# Altium PCB PCB1(zadanie_7).PcbDoc
Units mm, origin at the board's own origin, x right, y up, seen from the top; angles counter-clockwise.
Board outline 117.75 x 63.38 mm, 2 copper layers (Top Layer, Bottom Layer), stack 1.535 mm thick; 49 components, 73 nets, 316 pads, 80 vias.
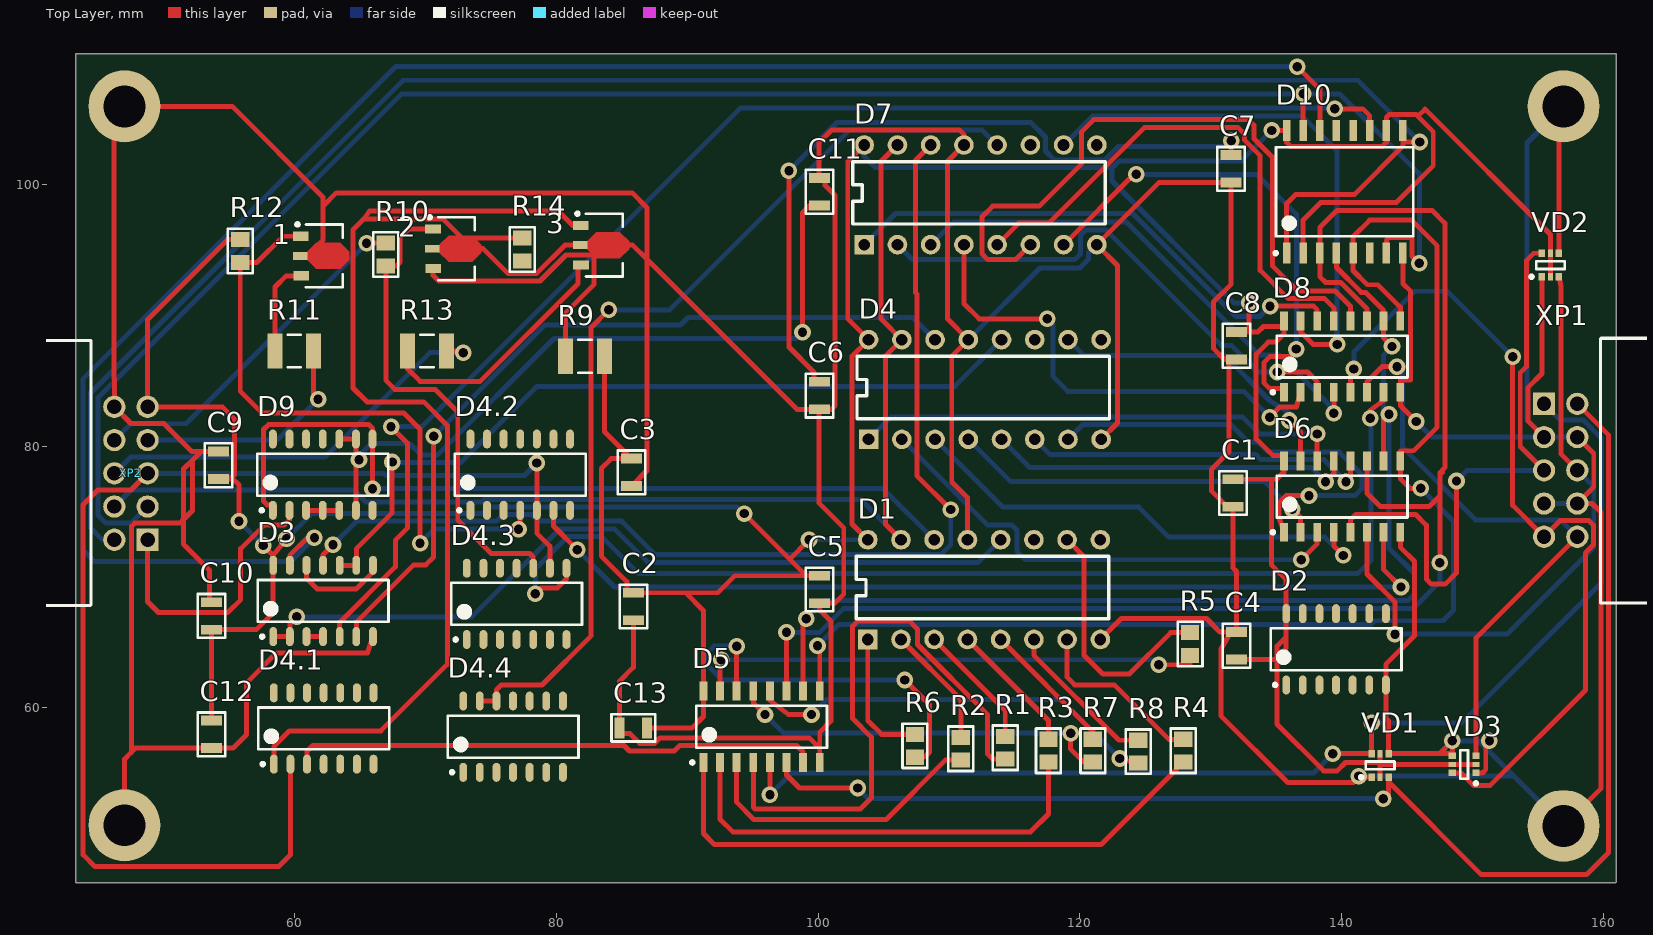
[diagram p0: Top Layer view]
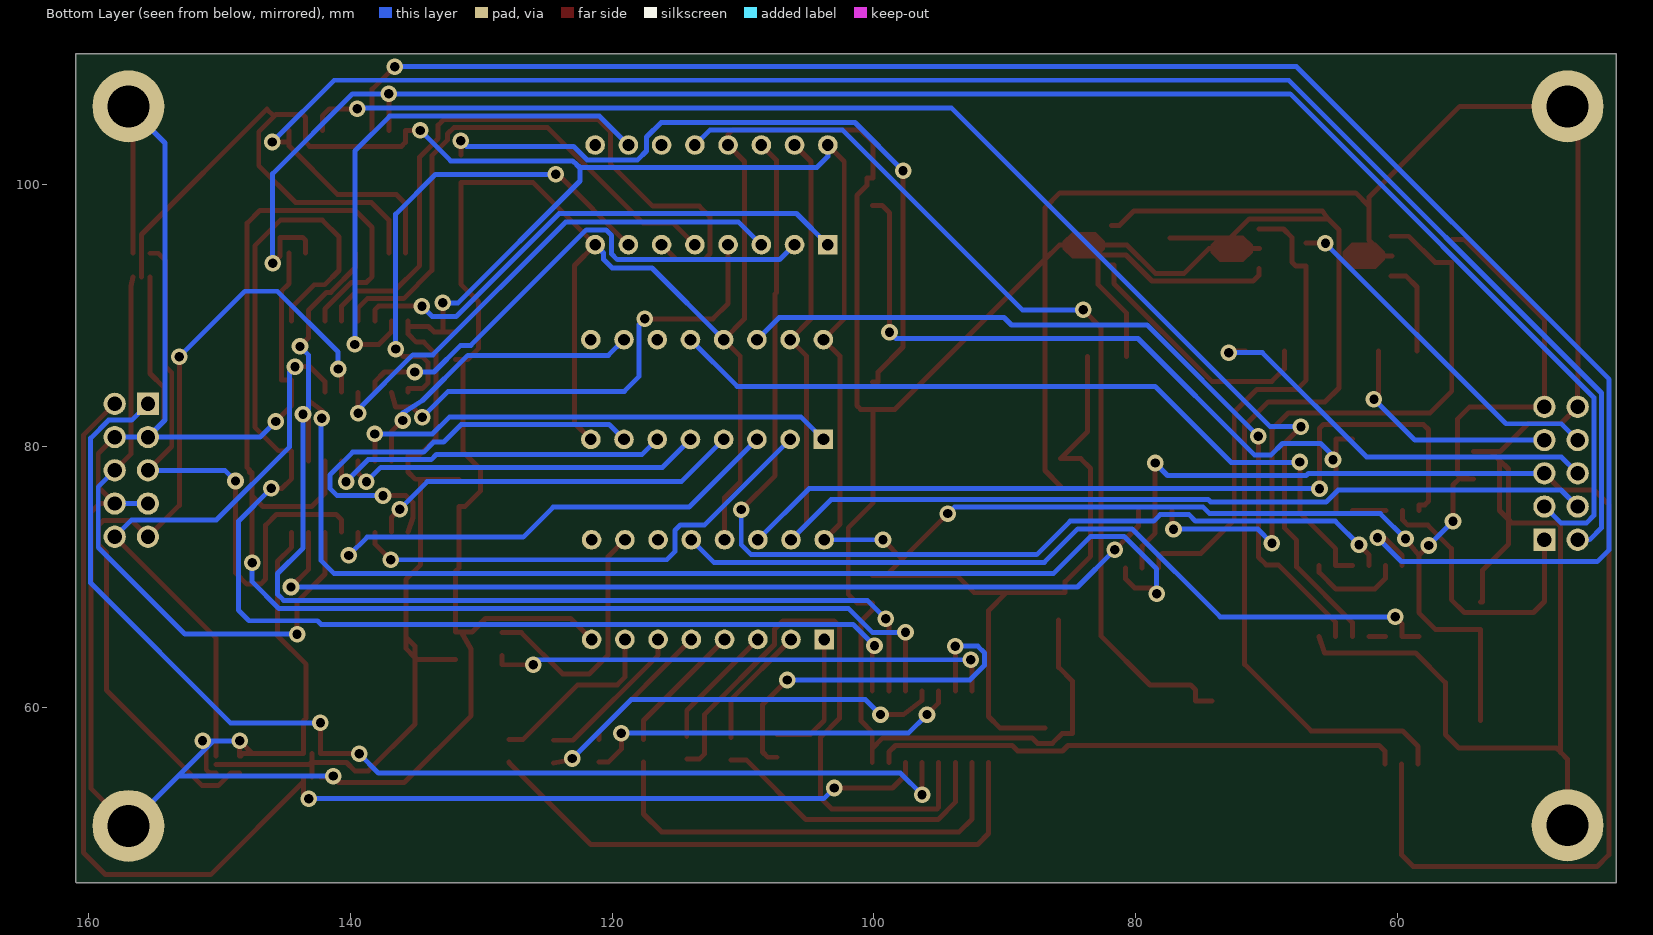
[diagram p1: Bottom Layer view, seen from below]
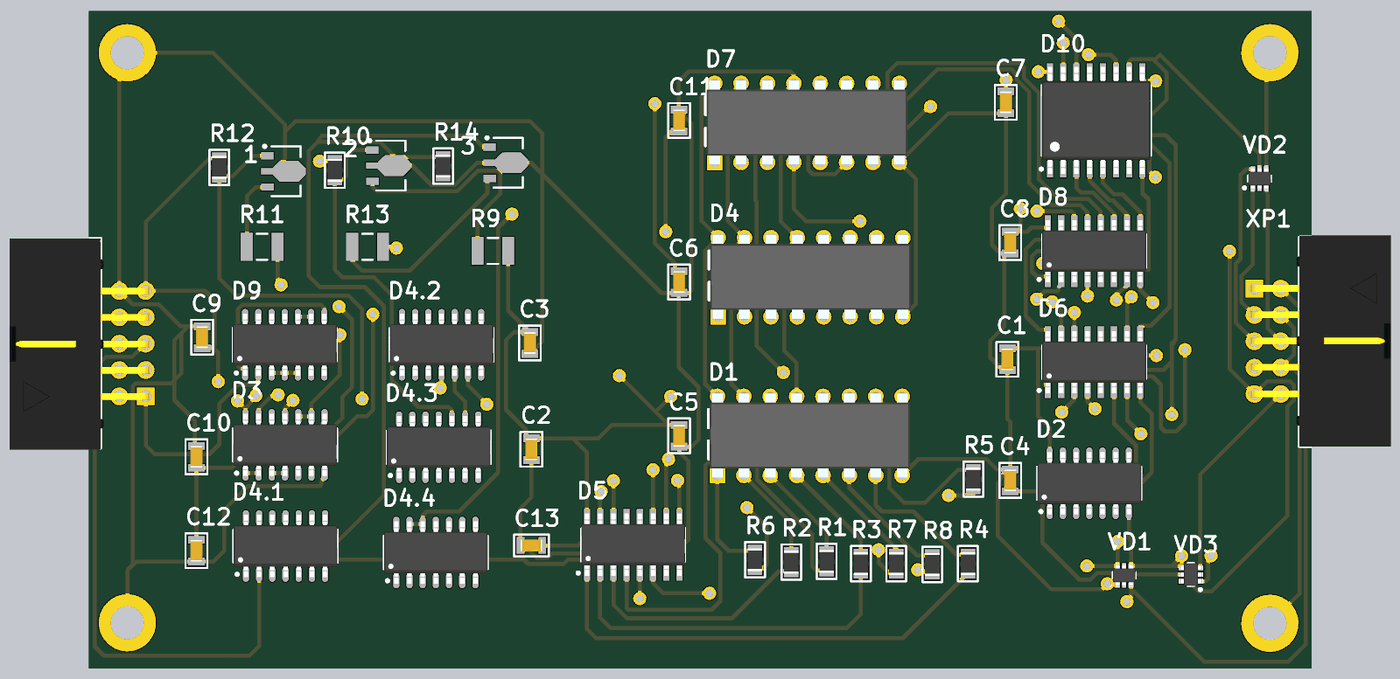
[diagram p2: 3D render of the assembled board from above, using the file's embedded part models]

## Layer stack, top to bottom
Top Solder: solder mask 0.0254, SM-001, Dk 4
Top Layer: signal copper 0.018
Dielectric 1: core 1.499, Core-043, Dk 4.3
Bottom Layer: signal copper 0.018
Bottom Solder: solder mask 0.0254, SM-001, Dk 4

## Board outline
43.25,46.625 160.925,46.625 160.975,46.675 161.004,46.654 161.004,47.972 161,48 161,110 43.25,110

## Design rules (kind name [scope] priority, off if disabled: settings)
Clearance [All] p1: gap=0.2 ignorepadtopadclearanceinfootprint=FALSE
DiffPairsRouting [All] p1: maxlimit=0.77 minlimit=0.2 mostfreqgap=0.35 toplayer_minwidth=0.2 toplayer_maxwidth=0.5 toplayer_prefwidth=0.38 bottomlayer_minwidth=0.2 bottomlayer_maxwidth=0.5 bottomlayer_prefwidth=0.38 maxuncoupledlength=12.7
HoleSize [All] p1: absolutevalues=TRUE maxlimit=4.5 minlimit=0.3 maxpercent=80.000 minpercent=20.000
PolygonConnect [All] p1: connectstyle=Relief reliefconductorwidth=0.254 reliefentries=4 polygonreliefangle="90 Angle" airgapwidth=0.254
RoutingVias [All] p1: holewidth=0.711 width=1.27 viastyle="Through Hole" minholewidth=0.711 minwidth=1.27 maxholewidth=0.711 maxwidth=1.27
SolderMaskExpansion [All] p1: expansion=0.102 istentingtop=FALSE
Width [All] p1: maxlimit=0.5 minlimit=0.2 preferedwidth=0.38 minimp=50.000000 maximp=50.000000 favimp=50.000000
28 further rules are at their usual default settings.

## Classes and differential pairs
component class МИЭТ_8161930_003_Э3_Лист_2: 1 2 3 C11 C12 C13 D9 D10 R9 R10 R11 R12 R13 R14 XP2 Р3
component class МИЭТ_8161930_003_Э3_Лист_1: C1 C2 C3 C4 C5 C6 C7 C8 C9 C10 D1 D2 D3 D4 D4.1 D4.2 D4.3 D4.4 D5 D6 D7 D8 R1 R2 R3 R4 R5 R6 R7 R8 VD1 VD2 VD3 XP1
differential pair L3: +L3_P -L3_N
differential pair L2: +L2_P -L2_N
differential pair L1: +L1_P -L1_N

## Components (designator, comment, footprint, x,y, rotation, side; value= is the part's Value field where it differs from the comment)
1 "Транзистор" SOT89-150P340X160-3N 62,94.55 r0 top
2 "Транзистор" SOT89-150P340X160-3N 72.1,95.1 r0 top
3 "Транзистор" SOT89-150P340X160-3N 83.4,95.375 r0 top
C1 "" 0805_N 131.7,76.425 r90 top
C2 "" 0805_N 85.875,67.75 r90 top
C3 "" 0805_N 85.725,78 r90 top
C4 "" 0805_N 131.975,64.75 r90 top
C5 "" 0805_N 100.1,69.05 r90 top
C6 "" 0805_N 100.1,83.875 r90 top
C7 "" 0805_N 131.55,101.2 r270 top
C8 "" 0805_N 131.975,87.675 r90 top
C9 "" 0805_N 54.175,78.55 r90 top
C10 "" 0805_N 53.625,67.025 r90 top
C11 "" 0805_N 100.1,99.45 r270 top
C12 "" 0805_N 53.625,57.975 r90 top
C13 "" 0805_N 85.875,58.475 r180 top
D1 "DIP-16" DIP16 103.79,65.23 r90 top
D2 "74AC00SC" SO14-N 139.585,64.475 r90 top
D3 "74AC00SC" SO14-N 62.155,68.175 r90 top
D4 "DIP-16" DIP16 103.855,80.525 r90 top
D4.1 "74AC00SC" SO14-N 62.2,58.425 r90 top
D4.2 "74AC00SC" SO14-N 77.225,77.825 r90 top
D4.3 "74AC00SC" SO14-N 76.95,67.95 r90 top
D4.4 "74AC00SC" SO14-N 76.675,57.8 r90 top
D5 "SOIC-16" SO16-N 95.675,58.55 r90 top
D6 "SOIC-16" SO16-N 140.05,76.15 r90 top
D7 "DIP-16" DIP16 103.52,95.405 r90 top
D8 "SOIC-16" SO16-N 140.05,86.85 r90 top
D9 "74AC00SC" SO14-N 62.125,77.825 r90 top
D10 "MC14520BDWG" SOIC-16W-N 140.25,99.45 r90 top
R1 "0805" RES_0805_2012_N 114.3,56.95 r270 top
R2 "0805" RES_0805_2012_N 110.9,56.875 r270 top
R3 "0805" RES_0805_2012_N 117.6,56.725 r270 top
R4 "0805" RES_0805_2012_N 127.9,56.725 r270 top
R5 "0805" RES_0805_2012_N 128.425,64.875 r270 top
R6 "0805" RES_0805_2012_N 107.4,57.1 r270 top
R7 "0805" RES_0805_2012_N 121,56.725 r270 top
R8 "0805" RES_0805_2012_N 124.475,56.65 r270 top
R9 "Резистор" CAPC3225X06N 82.175,86.875 r0 top
R10 "0805" RES_0805_2012_N 66.95,94.65 r90 top
R11 "Резистор" CAPC3225X06N 59.95,87.275 r0 top
R12 "0805" RES_0805_2012_N 55.825,94.925 r90 top
R13 "Резистор" CAPC3225X06N 70.1,87.275 r0 top
R14 "0805" RES_0805_2012_N 77.375,95.05 r90 top
VD1 "SOT-363" SOT363_NXP 142.95,55.6 r90 top
VD2 "SOT-363" SOT363_NXP 155.975,93.85 r90 top
VD3 "SOT-363" SOT363_NXP 149.375,55.675 r180 top
XP1 "TE_1-1634689-0" BH-10R 156.755,78.16 r180 top
XP2 "TE_1-1634689-0" BH-10R 47.47,77.93 r0 top

## Footprints (in the part's own frame and the unit in brackets; to place one, negate y for a bottom-side part, rotate by r counter-clockwise, add the part's x,y. Pads: shape width x height; smd on the part's side, far side on the other; paste and mask are expansions set on the pad)
0805_N [mm] "Резистор, конденсатор"
  rect 0.75x1.6 smd: 1(-1.05,0) 2(1.05,0)
  silkscreen extent -1.67,-1.05 1.68,1.05, body extent -1.05,-0.58 1.05,0.58, height 1
BH-10R [mm] "Разъем угловой 2х5х2,54 типа ВН"
  rect 1.7x1.7 hole 1.1: 1(1.27,-5.08)
  round 1.7 hole 1.1: 2(-1.27,-5.08) 3(1.27,-2.54) 4(-1.27,-2.54) 5(1.27,0) 6(-1.27,0) 7(1.27,2.54) 8(-1.27,2.54) 9(1.27,5.08) 10(-1.27,5.08)
  silkscreen extent -11.8,-10.1 -3.05,10.15, body extent -11.85,-10.2 1.65,10.15, height 9.13
CAPC3225X06N [mm] "Chip Capacitor, 2-Leads, Body 3,20x2,50mm, IPC Medium Density"
  rect 1.15x2.7 smd: 1(-1.475,0) 2(1.475,0)
  silkscreen extent -0.5,-1.25 0.5,1.25, body extent -1.7,-1.35 1.7,1.35, height 0.6
DIP16 [mm]
  rect 1.5x1.5 hole 0.9: 1(0,0)
  round 1.5 hole 0.9: 2(0,-2.54) 3(0,-5.08) 4(0,-7.62) 5(0,-10.16) 6(0,-12.7) 7(0,-15.24) 8(0,-17.78) 9(7.62,-17.78) 10(7.62,-15.24) 11(7.62,-12.7) 12(7.62,-10.16) 13(7.62,-7.62) 14(7.62,-5.08) 15(7.62,-2.54) 16(7.62,0)
  silkscreen extent 1.58,-18.41 6.35,0.89, body extent -0.25,-18.54 7.95,0.76, height 5.08
RES_0805_2012_N [mm] "Rezistor 0805"
  rect 1.15x1.4 smd: 1(-0.875,0) 2(0.875,0)
  silkscreen extent -1.7,-0.95 1.7,0.95, body extent -1.1,-0.7 1.1,0.7, height 0.6
SO14-N [mm]
  oval 1.45x0.6 smd: 1(-2.725,3.81) 2(-2.725,2.54) 3(-2.725,1.27) 4(-2.725,0) 5(-2.725,-1.27) 6(-2.725,-2.54) 7(-2.725,-3.81) 8(2.725,-3.81) 9(2.725,-2.54) 10(2.725,-1.27) 11(2.725,0) 12(2.725,1.27) 13(2.725,2.54) 14(2.725,3.81)
  silkscreen extent -2.85,-5 1.6,5, body extent -3,-5 3,5, height 1.45
SO16-N [mm] "SOIC, 16-Leads, Body 9,90x3,90mm, Pitch 1,27mm, IPC Medium Density"
  rect 1.45x0.6 smd: 1(-2.725,4.445) 2(-2.725,3.175) 3(-2.725,1.905) 4(-2.725,0.635) 5(-2.725,-0.635) 6(-2.725,-1.905) 7(-2.725,-3.175) 8(-2.725,-4.445) 9(2.725,-4.445) 10(2.725,-3.175) 11(2.725,-1.905) 12(2.725,-0.635) 13(2.725,0.635) 14(2.725,1.905) 15(2.725,3.175) 16(2.725,4.445)
  silkscreen extent -2.85,-5 1.6,5.42, body extent -3,-5 3,5, height 1.45
SOIC-16W-N [mm] "SOIC, 16-Leads, Body 10,30x7,50mm, Pitch 1,27mm, IPC Medium Density"
  rect 1.62x0.58 smd: 1(-4.69,4.445) 2(-4.69,3.175) 3(-4.69,1.905) 4(-4.69,0.635) 5(-4.69,-0.635) 6(-4.69,-1.905) 7(-4.69,-3.175) 8(-4.69,-4.445) 9(4.69,-4.445) 10(4.69,-3.175) 11(4.69,-1.905) 12(4.69,-0.635) 13(4.69,0.635) 14(4.69,1.905) 15(4.69,3.175) 16(4.69,4.445)
  silkscreen extent -4.81,-5.25 3.4,5.41, body extent -5.15,-5.25 5.15,5.25, height 2.65
SOT89-150P340X160-3N [mm] "SOT89, 3-Leads, Body 4,60x2,60mm, Pitch 1,50mm, Lead Span 3,4mm, IPC Medium Density"
  rect 1.2x0.7 smd: 1(-1.55,1.5) 2(-1.524,-1.524)
  rect 1.1x0.6 smd: 3(-1.6,0)
  Top Layer region: -1.05,0.3 -0.35,1 1.45,1 2.15,0.3 2.15,-0.3 1.45,-1 -0.35,-1 -1.05,-0.3
  silkscreen extent -1.92,-2.4 1.65,2.52, body extent -1.15,-2.4 1.65,2.4, height 1.6
SOT363_NXP [mm]
  rect 0.55x0.5 smd: 1(-0.9,0.65) 3(-0.9,-0.65) 4(0.9,-0.65) 6(0.9,0.65)
  rect 0.55x0.4 smd: 2(-0.9,0) 5(0.9,0)
  silkscreen extent -1.02,-1.1 0.3,1.57, body extent -1.15,-1.1 1.15,1.1, height 1.1

## Part data
1 2 3: "Транзистор 2Т665А9 АЕЯР.432140.605 ТУ"
C1 C2 C3 C4 C5 C6 C7 C8 C9 C10 C11 C12 C13: library part К10-79_0805_Н90, "Чип конденсатор 0805 Н90 ряд Е6", Case=0805, Manufacturer="ООО \"Кулон\"", Tolerance=+80%-20%, BOM="Конденсатор К10-79-*-B-*+80%-20%-Н90 АЖЯР.673511.004 ТУ", Created_by=Желобаев, Issue_date=19_12_2018, Name="Конденсатор К10-79", TKE=Н90, TU="АЖЯР.673511.004 ТУ", Type=K10-79, Version=0, Weight=0.05
D1 D4 D7: library part HCF4017BEY, "Декадный счетчик c 10 декодированными выходами", Manufacturer=STMicroelectronics, Power_Voltage="-0.5 -22 V", BOM="Микросхема HCF4017BEY \"STMicroelectronics\"", Case=DIP-16, Created_by=Желобаев, Issue_date=05.04.2019, Name="Микросхема HCF4017BEY", Version=0
D2 D3 D4.1 D4.2 D4.3 D4.4 D9: "4 элемента 2И-НЕ TTL SOIC-14", Case=SOIC-14, Manufacturer="ON Semiconductor", Power_Voltage="4.5 - 5.5 V", BOM="Микросхема 74AC00SC \"ON Semiconductor\"", Created_by=Желобаев, Issue_date=10.04.2019, Name="Микросхема 74AC00SC", Version=0
D5 D6 D8: library part 74HC151D, "мультиплексор 8 канальный CMOS", Manufacturer="NXP Semiconductors", Power_Voltage="2.0 -6.0 V", BOM="Микросхема 74YC151D \"NXP Semiconductors\"", Case=SOIC-16, Created_by=Желобаев, Issue_date=05.04.2019, Name="Микросхема 74YC151D", Version=0
D10: "Два двоичных счетчика", Case=SOIC-16, Manufacturer=Motorola, BOM="Микросхема MC14520BDWG \"Motorola\"", Created_by=Желобаев, Issue_date=6.01.2019, Name="Микросхема MC14520BDWG", Version=0
R1 R2 R3 R4 R5 R6 R7 R8 R10 R12 R14: library part Р1-12-0,125-5%, "Резистор от 0,75 Ом до 2 МОм", Manufacturer="ОАО \"НПО \"Эркон\"", Tolerance=5%, Voltage=150, BOM="Резистор Р1-12-0,125 * 5%-M-\"A\" АЛЯР.434110.005 ТУ", ComponentLink1Description="Сайт производителя", ComponentLink1URL=https://www.erkon-nn.ru/catalog/rezistory-obshchego-primeneniya/, Created_by=Желобаев, Hight=0,5, Issue_date=05_12_2018, LiveStatus=Производится, Name="Резистор Р1-12-0,125", Reliability=0,000001, Size=0805, TKR=M, TU="АЛЯР.434110.005 ТУ", Type="Р1-12-0,125±5%-М-\"А\"", Version=00, Weight=0,01
R9 R11 R13: "Резистор Р1-12-0,1 4,7 кОм 5%-M-\"A\" АЛЯР.434110.005 ТУ"
VD1 VD2 VD3: library part BAV99S, "Высокоскоростные, переключающие диоды", Manufacturer=Nexperia, Voltage=100, BOM="Диод BAV99S \"Nexperia\"", Case=SOT-363, Created_by=Желобаев, Issue_date=07.01.2019, Name="Диод BAV99S", Version=0
XP1 XP2: "Вилка типа BH-10R угловая правая двухрядная 2х5х2.54", Case=BH-10R, Manufacturer="TE Connectivity", BOM="Вилка угловая TE_1-1634689-0 \"TE Connectivity\"", Created_by=Желобаев, Issue_date=13.05.2019, Name="Вилка угловая TE_1-1634689-0", Version=0

## Free pads (board coordinates)
  round 5.5 hole 3.2: 1(-315.3,94.275) M1(46.975,51.025) M2(46.975,105.975) M3(156.975,105.975) M4(156.975,50.975)

## Via types
v1: diameter 1.27, hole 0.711, Top Layer to Bottom Layer, 80 vias

## Nets (pads, with @x,y where several pads share a name; then routed paths per layer and width w, separated by ;. In a path a pad name is that pad's centre, name@x,y a point inside that pad or via, vN(x,y) a via of type N, cw(c..) or ccw(c..) an arc to the next point about the centre after c; other vN are vias at no path point)
+5: C1.2 C2.2 C3.2 C4.1 C5.2 C8.2 C9.1 C10.1 C12.2 C13.1 D1.16 D2.14 D3.14 D4.16 D5.16 D6.16 D7.16 D8.16 D10.2 D10.10 D10.16 R9.2 R12.2 VD1.2 VD1.5 VD2.2 VD2.5 VD3.2 VD3.5 XP2.9 | length 356.6
  Top Layer w0.38: C12.2 C10.1 57.048,65.975 58.345,67.272 D3.14 58.345,71.652 ; v1(55.728,74.27) 55.728,77.043 55.169,77.602 ; R12.2 54.864,95.8 48.74,89.676 XP2.9 54.458,83.01 55.372,82.096 55.372,77.805 55.169,77.602 ; v1(57.582,72.415) 58.345,71.652 ; v1(59.36,72.923) 58.345,71.652 ; R9.2 83.65,81.125 C3.2 84.181,79.05 83.423,78.292 83.423,71.589 85.369,69.642 85.369,68.8 C2.2 89.865,68.8 ; C13.1 86.925,58.471 90.366,58.471 91.23,59.334 D5.16 91.23,67.435 89.865,68.8 ; v1(94.339,74.85) 97.818,71.371 ; v1(99.297,72.85) 97.818,71.371 ; C5.2 99.089,70.1 ; D7.16 102.26,101.765 102.26,89.74 D4.16 102.591,86.881 102.591,74.049 D1.16 ; C1.2 134.641,77.475 ; C4.1 134.925,63.7 135.077,63.852 ; C8.2 132.944,88.725 ; v1(132.944,90.957) 132.944,88.725 ; v1(134.671,104.14) D10.16 135.805,103.226 136.11,102.921 143.12,102.921 143.425,103.226 D10.10 143.425,105.122 143.662,105.359 145.694,105.359 145.844,105.21 ; D8.16 D8.16@135.605,89.154 ; D10.2 137.075,97.291 138.412,98.628 144.196,98.628 147.015,101.448 147.015,104.038 145.844,105.21 ; VD1.2 142.95,55.829 ; VD1.5 142.95,55.88 ; VD3.2 VD3.5 143.155,55.675 142.95,55.88 ; VD2.2 VD2.5 155.975,96.19 146.399,105.766 145.844,105.21 ; 55.169,77.602 55.067,77.5 C9.1 55.169,77.602 ; 89.865,68.8 92.329,68.8 93.629,70.1 99.089,70.1 ; 97.818,71.371 99.089,70.1 ; 132.944,88.725 133.607,88.725 134.036,89.154 D8.16@135.605,89.154 ; 134.641,77.475 135.051,77.475 135.605,78.029 D6.16 135.605,79.299 134.747,79.299 133.477,80.569 133.477,87.042 134.395,87.96 134.97,87.96 135.605,88.595 D8.16@135.605,89.154 ; 134.641,77.475 134.641,70.947 135.775,69.813 D2.14 135.775,65.417 ; 135.077,63.852 135.775,64.55 135.775,65.417 ; 135.077,63.852 135.077,64.719 135.775,65.417 ; 135.077,63.852 135.077,58.75 138.639,55.189 139.673,55.189 140.314,55.829 142.95,55.829 ; 142.95,55.829 142.95,55.88
  Bottom Layer w0.38: v1(55.728,74.27) v1(57.582,72.415) ; v1(59.36,72.923) 61.287,74.85 74.334,74.85 74.827,75.344 93.846,75.344 v1(94.339,74.85) ; v1(99.297,72.85) D1.16 ; D7.16 103.52,102.144 104.359,101.305 122.453,101.305 ; v1(132.944,90.957) 131.775,90.957 122.453,100.279 122.453,101.305 ; v1(134.671,104.14) 132.343,101.812 123.02,101.812 ; 122.453,101.305 122.513,101.305 123.02,101.812 ; 122.453,101.305 123.02,101.812
Canal16_0: D4.3 D6.4 | length 36.9
  Top Layer w0.38: D6.4 139.415,72.37 v1(140.132,71.653)
  Bottom Layer w0.38: D4.3 114.124,75.336 124.511,75.336 126.797,73.05 138.735,73.05 v1(140.132,71.653)
Canal16_1: D4.2 D6.3 | length 37.9
  Top Layer w0.38: v1(136.926,71.323) 138.145,72.542 D6.3
  Bottom Layer w0.38: D4.2 112.93,73.99 114.783,73.99 115.214,73.558 115.214,71.933 115.824,71.323 v1(136.926,71.323)
Canal16_2: D4.4 D6.2 | length 29
  Top Layer w0.38: v1(136.246,75.184) 136.875,74.555 D6.2
  Bottom Layer w0.38: D4.4 114.708,77.292 134.137,77.292 v1(136.246,75.184)
Canal16_3: D4.7 D6.1 | length 34.7
  Top Layer w0.38: D6.1 135.221,74.552 135.221,75.683 135.763,76.225 v1(137.516,76.225)
  Bottom Layer w0.38: D4.7 120.235,81.665 131.539,81.665 132.897,80.307 133.653,80.307 134.412,79.548 139.832,79.548 141.58,77.8 141.58,76.784 141.021,76.225 v1(137.516,76.225)
Canal16_4: D4.10 D6.15 | length 23.1
  Top Layer w0.38: v1(136.017,81.966) 136.875,81.108 D6.15
  Bottom Layer w0.38: D4.10 120.296,86.944 131.039,86.944 134.493,83.49 136.017,82.526 v1(136.017,81.966)
Canal16_5: D4.1 D6.14 | length 37.6
  Top Layer w0.38: D6.14 v1(138.145,80.941)
  Bottom Layer w0.38: D4.1 105.575,82.245 132.426,82.245 133.73,80.941 v1(138.145,80.941)
Canal16_6: D4.5 D6.13 | length 28
  Top Layer w0.38: v1(138.786,77.292) 139.415,77.922 D6.13
  Bottom Layer w0.38: D4.5 116.152,78.388 137.69,78.388 v1(138.786,77.292)
Canal16_7: D4.6 D6.12 | length 26.9
  Top Layer w0.38: v1(140.341,77.287) 140.685,77.631 D6.12
  Bottom Layer w0.38: D4.6 117.705,79.375 133.424,79.375 133.831,78.968 138.659,78.968 v1(140.341,77.287)
Canal16_8: D7.3 D8.4 | length 39.3
  Top Layer w0.38: v1(139.415,82.525) D8.4
  Bottom Layer w0.38: D7.3 110.325,97.13 123.562,97.13 133.706,86.986 135.242,86.986 139.415,82.813 v1(139.415,82.525)
Canal16_9: D7.2 D8.3 | length 40
  Top Layer w0.38: v1(135.103,85.674) 137.408,85.674 138.145,84.938 D8.3
  Bottom Layer w0.38: D7.2 107.206,94.259 119.609,94.259 120.04,94.691 120.04,96.114 120.472,96.545 121.971,96.545 130.806,87.71 131.584,87.71 133.62,85.674 v1(135.103,85.674)
Canal16_10: D7.4 D8.2 | length 37.3
  Top Layer w0.38: D7.4 111.14,90.907 112.308,89.738 v1(117.5,89.738) ; v1(134.518,82.22) 135.306,83.007 136.57,83.007 D8.2
  Bottom Layer w0.38: v1(117.5,89.738) 117.932,89.306 117.932,85.344 119.075,84.201 132.537,84.201 v1(134.518,82.22)
Canal16_11: D7.7 D8.1 | length 38.1
  Top Layer w0.38: D7.7 124.142,100.787 v1(124.308,100.787) ; D8.1 135.605,84.404 134.518,84.404 134.061,84.861 134.061,86.385 134.518,86.843 135.966,86.843 v1(136.55,87.427)
  Bottom Layer w0.38: v1(124.308,100.787) 133.502,100.787 136.55,97.739 v1(136.55,87.427)
Canal16_12: D7.10 D8.15 | length 41.8
  Top Layer w0.38: D8.15 136.875,88.728 137.82,87.782 v1(139.675,87.782)
  Bottom Layer w0.38: D7.10 120.967,105.232 137.008,105.232 139.675,102.565 v1(139.675,87.782)
Canal16_13: D7.1 D8.14 | length 40.2
  Top Layer w0.38: v1(134.544,90.703) 137.866,90.703 138.145,90.424 D8.14
  Bottom Layer w0.38: D7.1 105.905,97.79 124.054,97.79 131.928,89.916 133.756,89.916 v1(134.544,90.703)
Canal16_14: D7.5 D8.13 | length 41.6
  Top Layer w0.38: D7.5 115.328,97.053 117.627,97.053 124.952,104.378 132.08,104.378 132.597,103.861 132.597,103.394 133.782,102.21 133.782,93.442 135.941,91.283 138.714,91.283 139.415,90.582 D8.13
Canal16_15: D7.6 D8.12 | length 52.3
  Top Layer w0.38: D7.6 115.08,94.265 112.974,94.265 112.522,94.717 112.522,97.536 113.335,98.349 116.891,98.349 120.142,101.6 120.142,104.038 121.061,104.958 132.893,104.958 133.303,104.547 133.303,103.526 134.722,102.108 134.722,93.802 136.66,91.863 139.523,91.863 140.685,90.702 D8.12
D1.1(1): D1.14 D9.1 D9.8 | length 64.5
  Top Layer w0.38: D9.1 58.315,75.514 57.887,75.514 57.607,75.794 57.607,81.28 57.992,81.665 65.634,81.665 65.935,81.364 D9.8 v1(65.935,76.759)
  Bottom Layer w0.38: v1(65.935,76.759) 104.961,76.759 D1.14
D1.1(2): D1.15 D4.15 D7.15 XP2.4 | length 94.8
  Top Layer w0.38: D7.15 104.8,101.765 104.8,89.74 D4.15 105.131,86.881 105.131,74.049 D1.15
  Bottom Layer w0.38: XP2.4 47.467,76.657 64.504,76.657 65.427,75.734 74.247,75.734 74.437,75.924 103.256,75.924 D1.15
D2.1(1): D5.11 D6.11 D8.11 D10.3 | length 112.3
  Top Layer w0.38: D5.11 v1(97.58,65.777) ; D6.11 141.955,76.403 142.971,75.387 146.71,75.387 147.523,76.2 ; D8.11 141.955,90.498 139.937,92.516 138.787,92.516 138.345,92.958 D10.3 138.345,96.723 139.639,98.017 146.94,98.017 147.904,97.053 147.904,78.362 147.726,78.184 147.726,77.981 147.523,77.981 147.523,76.2 ; v1(147.523,71.095) 147.523,76.2
  Bottom Layer w0.38: v1(97.58,65.777) 100.11,65.777 101.917,67.584 145.465,67.584 147.523,69.642 v1(147.523,71.095)
D2.1(2): D5.10 D6.10 D8.10 D10.4 | length 85.9
  Top Layer w0.38: D5.10 98.85,66.567 v1(99.085,66.802) ; D10.4 139.615,93.659 141.51,91.763 141.835,91.763 143.225,90.373 D8.10 143.225,88.271 v1(143.866,87.63) ; D6.10 143.225,82.042 v1(143.631,82.448)
  Bottom Layer w0.38: v1(99.085,66.802) 100.499,68.215 145.11,68.215 145.576,68.682 145.576,70.265 143.631,72.21 v1(143.631,82.448) 143.222,82.858 143.222,86.986 v1(143.866,87.63)
D2.1(3): D5.9 D6.9 D8.9 D10.5 | length 101.2
  Top Layer w0.38: v1(99.949,64.745) 100.12,64.574 D5.9 ; D8.9 144.495,90.627 142.779,92.343 141.97,92.343 140.885,93.428 D10.5 140.885,96.003 142.159,97.278 145.36,97.278 147.319,95.318 147.319,81.454 145.52,79.654 144.495,79.654 D6.9 144.495,77.526 145.237,76.784 v1(146.05,76.784)
  Bottom Layer w0.38: v1(99.949,64.745) 101.575,66.37 142.24,66.37 142.528,66.659 147.761,66.659 148.565,67.462 148.565,74.27 v1(146.05,76.784)
D3.2(1): D3.5 D10.11 | length 105
  Top Layer w0.38: D3.5 63.425,66.524 67.682,70.781 67.682,72.812 68.601,73.731 68.601,80.251 v1(67.352,81.5) ; v1(139.497,105.791) 141.622,105.791 142.155,105.258 D10.11
  Bottom Layer w0.38: v1(67.352,81.5) 69.709,81.5 94.077,105.867 139.421,105.867 v1(139.497,105.791)
D3.2(2): D3.13 D10.14 | length 143.4
  Top Layer w0.38: D3.13 59.615,71.655 60.96,73 v1(61.493,73) ; v1(136.627,109.017) 138.345,107.298 D10.14
  Bottom Layer w0.38: v1(61.493,73) 59.665,71.171 44.704,71.171 43.79,72.085 43.79,85.115 67.691,109.017 v1(136.627,109.017)
D4.1(1): 3.1 D4.1.1 R14.2 | length 87.2
  Top Layer w0.38: D4.1.1 58.39,57.048 59.584,58.242 66.573,58.242 71.653,63.322 71.653,81.585 69.85,83.388 65.507,83.388 64.44,84.455 64.44,96.545 65.278,97.384 ; R14.2 72.756,95.925 71.298,97.384 65.278,97.384 ; 3.1 81.23,96.875 80.112,97.993 65.71,97.993 65.278,97.384
D4.1(2): D4.1.2 D4.2.5 D4.3.9 XP2.5 | length 94.9
  Top Layer w0.38: XP2.5 47.467,76.657 44.933,76.657 43.815,75.54 43.815,48.768 44.704,47.879 58.771,47.879 59.66,48.768 D4.1.2 ; v1(78.495,78.715) D4.2.5 78.495,73.36 79.49,72.365 D4.3.9
  Bottom Layer w0.38: XP2.5 66.79,77.93 66.954,77.766 77.546,77.766 v1(78.495,78.715)
D4.2(1): 1.1 D4.2.4 R12.1 | length 48.4
  Top Layer w0.38: 1.1 59.11,96.05 57.11,94.05 R12.1 55.825,84.205 57.48,82.55 68.301,82.55 69.571,81.28 v1(69.571,72.593) ; v1(77.089,73.66) 77.225,73.796 D4.2.4
  Bottom Layer w0.38: v1(69.571,72.593) 70.637,73.66 v1(77.089,73.66)
D4.3(1): 2.1 D4.3.10 R10.1 | length 37.2
  Top Layer w0.38: 2.1 68.682,96.6 68.047,95.965 68.047,94.082 67.74,93.775 R10.1 66.95,85.044 67.64,84.353 70.714,84.353 72.45,82.617 72.45,74.362 75.006,71.806 77.941,71.806 78.22,71.526 D4.3.10
GND: 1.3 2.3 3.3 C1.1 C2.1 C3.1 C4.2 C5.1 C6.1 C7.2 C8.1 C9.2 C10.2 C11.1 C12.1 C13.2 D1.8 D1.13 D2.7 D3.7 D4.8 D4.13 D5.8 D6.8 D7.8 D7.13 D8.8 D10.8 pad.M1 pad.M2 pad.M3 pad.M4 VD1.1 VD1.4 VD2.1 VD2.4 VD3.1 VD3.4 XP1.3 XP1.4 XP1.7 XP1.8 XP2.10 | length 612.8
  Top Layer w0.38: pad.M1 46.975,56.083 47.498,56.606 ; C10.2 53.467,68.075 53.467,70.536 51.486,72.517 51.486,74.397 ; C9.2 52.832,79.6 ; 1.3 60.96,94.55 62.154,95.744 62.154,98.349 ; D3.7 65.559,64.211 58.598,64.211 56.312,61.925 56.312,57.966 55.27,56.925 C12.1 47.817,56.925 47.498,56.606 ; 2.3 74.386,95.1 76.276,93.21 78.478,93.21 80.643,95.375 3.3 85.827,95.375 86.919,94.283 ; C3.1 86.919,78.144 86.919,94.283 ; C2.1 85.875,63.102 84.825,62.052 C13.2 84.825,58.039 85.606,58.039 86.36,57.285 87.486,57.285 87.909,57.709 99.307,57.709 100.12,56.896 ; D5.8 100.12,56.896 ; D1.13 111.41,76.067 110.211,77.267 110.211,86.881 D4.13 109.88,89.74 109.88,101.765 D7.13 111.14,103.835 110.81,104.165 101.016,104.165 100.076,103.226 100.076,100.5 C11.1 100.533,100.5 100.533,99.924 101.295,99.162 101.295,83.109 101.011,82.825 C6.1 C6.1@100.076,82.825 ; D1.8 123.167,66.827 129.681,66.827 130.708,65.8 C4.2@131.547,65.8 ; D4.8 122.885,81.775 122.885,93.82 D7.8 126.045,100.15 C7.2 131.572,100.15 131.572,92.388 130.205,91.021 130.205,87.484 131.064,86.625 C8.1@131.42,86.625 ; C8.1 C8.1@131.42,86.625 ; v1(141.326,54.788) v1@141.369,54.744 ; D6.8 144.495,72.287 145.576,71.206 145.576,65.505 143.395,63.324 D2.7 143.395,59.209 143.6,59.004 VD1.4 147.495,56.5 ; D10.8 144.695,92.439 145.288,91.846 145.288,85.063 145.28,85.055 144.495,85.055 D8.8 144.495,83.109 v1(145.714,81.89) ; VD3.1 150.783,55.025 151.028,55.27 151.028,57.201 v1(151.308,57.48) ; VD2.1 155.325,85.56 154.245,84.48 154.245,81.94 XP1.3 ; VD2.4 156.625,105.975 pad.M3 ; pad.M4 159.845,53.845 159.845,74.93 159.155,75.62 XP1.8 159.283,76.878 159.283,79.442 XP1.4 ; 47.498,56.606 47.498,73.863 47.752,74.117 51.206,74.117 51.486,74.397 ; 51.486,74.397 52.172,75.082 52.172,78.94 ; 51.486,74.397 51.486,78.254 52.172,78.94 ; 52.172,78.94 52.832,79.6 ; 52.832,79.6 52.124,79.6 49.987,81.737 47.473,81.737 XP2.10 46.2,85.115 46.177,85.138 46.177,105.975 pad.M2 55.213,105.975 62.154,99.035 62.154,98.349 ; 62.154,98.349 63.17,99.365 85.776,99.365 86.919,98.222 86.919,94.283 ; 86.919,94.283 98.377,82.825 C6.1@100.076,82.825 ; C6.1@100.076,82.825 100.076,75.641 101.956,73.762 101.956,68.682 101.274,68 C5.1 100.1,67.495 100.986,66.61 100.986,59.006 100.12,58.141 100.12,56.896 ; C8.1@131.42,86.625 131.42,79.591 130.048,78.22 130.048,76.594 131.267,75.375 C1.1 131.7,70.709 131.975,70.434 C4.2 C4.2@131.547,65.8 ; C4.2@131.547,65.8 130.785,64.465 130.785,59.411 135.915,54.28 140.905,54.28 v1@141.369,54.744 ; v1@141.369,54.744 141.413,54.7 VD1.1 v1@141.369,54.744 ; 147.495,56.5 148.39,56.5 148.39,56.325 VD3.4 v1(148.475,57.48) 147.495,56.5
  Bottom Layer w0.38: D4.13 116.954,93.624 120.004,93.624 120.665,94.285 120.665,94.77 D7.8 ; v1(141.326,54.788) 153.162,54.788 ; v1(145.714,81.89) 146.904,80.7 XP1.3 ; v1(148.475,57.48) 150.47,57.48 ; v1(151.308,57.48) 150.47,57.48 ; XP1.7 XP1.8 ; pad.M4 153.162,54.788 ; pad.M3 154.178,103.178 154.178,82.007 XP1.3 ; XP1.4 XP1.3 ; 150.47,57.48 153.162,54.788
L1_N: D5.6 VD1.3 XP1.2 | length 104.9
  Top Layer w0.38: D5.6 97.58,54.864 98.571,53.873 v1(103.022,53.873) ; v1(143.205,53.061) 143.6,53.455 143.6,54.342 ; VD1.3 143.6,54.342 ; XP1.2 160.425,80.84 160.425,48.944 158.736,47.255 150.687,47.255 143.6,54.342
  Bottom Layer w0.38: v1(103.022,53.873) 103.835,53.061 v1(143.205,53.061)
L1_P: D5.5 VD1.6 XP1.1 | length 90.6
  Top Layer w0.38: v1(96.31,53.365) D5.5 ; v1(139.344,56.5) VD1.6 v1(142.3,58.861)
  Bottom Layer w0.38: v1(96.31,53.365) 97.972,55.027 137.872,55.027 v1(139.344,56.5) ; v1(142.3,58.861) 149.183,58.861 159.868,69.545 159.868,80.62 158.496,81.991 156.734,81.991 XP1.1
L2_N: D6.6 VD2.3 XP1.6 | length 48.4
  Top Layer w0.38: D6.6 141.955,70.237 144.085,68.107 v1(144.085,65.634) ; VD2.3 156.769,92.239 156.769,79.416 XP1.6
  Bottom Layer w0.38: v1(144.085,65.634) 152.654,65.634 159.283,72.263 159.283,76.902 XP1.6
L2_P: D6.5 VD2.6 XP1.5 | length 46.6
  Top Layer w0.38: D6.5 140.685,74.371 141.091,74.778 145.669,74.778 146.482,73.965 146.482,69.85 146.875,69.456 147.93,69.456 148.793,70.32 v1(148.793,77.343) ; VD2.6 154.694,94.75 154.127,94.183 154.127,86.086 153.665,85.624 153.665,79.98 XP1.5
  Bottom Layer w0.38: v1(148.793,77.343) 149.61,78.16 XP1.5
L3_N: D8.6 VD3.3 XP1.10 | length 46.1
  Top Layer w0.38: D8.6 141.955,84.938 143.098,86.081 v1(144.247,86.081) ; VD3.3 150.275,65.33 XP1.10
  Bottom Layer w0.38: v1(144.247,86.081) 144.656,85.671 144.656,79.956 150.241,74.371 156.734,74.371 XP1.10
L3_P: D8.5 VD3.6 XP1.9 | length 65
  Top Layer w0.38: D8.5 140.685,85.643 v1(140.945,85.903) ; VD3.6 149.149,55.025 150.123,54.051 151.342,54.051 158.648,61.358 158.648,71.857 159.265,72.473 159.265,73.965 158.909,74.32 156.725,74.32 XP1.9 153.085,75.48 v1(153.085,86.844)
  Bottom Layer w0.38: v1(140.945,85.903) 140.945,87.198 145.593,91.846 148.082,91.846 v1(153.085,86.844)
Net1_2: 1.2 R11.1 | length 7.2
  Top Layer w0.38: R11.1 58.475,92.167 59.334,93.026 1.2
Net2_2: 2.2 R9.1 | length 22.5
  Top Layer w0.38: 2.2 70.561,93.576 70.561,93.066 70.997,92.63 78.736,92.63 80.721,94.615 82.88,94.615 82.88,92.376 80.7,90.195 R9.1
Net3_2: 3.2 R13.1 | length 19.5
  Top Layer w0.38: R13.1 68.625,85.909 69.579,84.955 74.16,84.955 81.636,92.431 81.636,93.851 3.2
NetC6_2: C6.2 C7.1 | length 56.2
  Top Layer w0.38: v1(97.765,101.067) 97.765,87.579 99.67,85.674 99.67,84.925 C6.2 ; C7.1 131.572,102.25 v1(131.572,103.353)
  Bottom Layer w0.38: v1(97.765,101.067) 101.443,104.745 116.26,104.745 117.373,103.632 117.373,102.565 118.054,101.885 121.92,101.885 122.956,102.921 131.14,102.921 v1(131.572,103.353)
NetC11_2: C11.2 D9.6 D9.9 D9.10 | length 56.5
  Top Layer w0.38: D9.10 D9.9 v1@64.665,79.201 ; D9.6 v1@64.665,79.201 ; v1(64.897,78.969) v1@64.665,79.201 ; v1(98.806,88.722) 98.806,97.841 99.365,98.4 C11.2
  Bottom Layer w0.38: v1(64.897,78.969) 64.897,79.273 65.837,80.213 68.758,80.213 69.63,79.341 70.908,79.341 79.805,88.238 98.322,88.238 v1(98.806,88.722)
NetD1_1: D1.1 R6.1 | length 10.2
  Top Layer w0.38: D1.1 103.79,59.036 104.851,57.975 R6.1
NetD1_2: D1.2 R2.1 | length 9.4
  Top Layer w0.38: D1.2 110.9,60.66 R2.1
NetD1_3: D1.3 R1.1 | length 9.7
  Top Layer w0.38: D1.3 114.3,59.8 R1.1
NetD1_4: D1.4 R3.1 | length 10.2
  Top Layer w0.38: D1.4 117.6,59.04 R3.1
NetD1_5: D1.5 R7.1 | length 10.6
  Top Layer w0.38: D1.5 121,58.18 R7.1
NetD1_6: D1.6 R8.1 | length 11.9
  Top Layer w0.38: D1.6 116.49,64.026 122.991,57.525 R8.1
NetD1_7: D1.7 R4.1 | length 13.7
  Top Layer w0.38: D1.7 119.03,62.344 119.61,61.764 122.633,61.764 126.797,57.6 R4.1
NetD1_10: D1.10 R5.1 | length 19.4
  Top Layer w0.38: D1.10 120.32,71.56 120.32,64.019 121.753,62.586 123.785,62.586 126.949,65.75 R5.1
NetD1_12: D1.12 D3.1 D3.2 | length 61.4
  Top Layer w0.38: D3.1 D3.2 59.615,66.422 v1(60.147,66.954)
  Bottom Layer w0.38: v1(60.147,66.954) 73.528,66.954 80.264,73.69 84.409,73.69 86.969,71.13 112.23,71.13 D1.12
NetD3_3: D3.3 D3.4 | length 1.3
  Top Layer w0.38: D3.3 D3.4
NetD3_6: D3.6 D4.14 | length 61.1
  Top Layer w0.38: D3.6 64.695,66.548 69.078,70.931 70.016,70.931 70.612,71.526 v1(70.612,80.772)
  Bottom Layer w0.38: v1(70.612,80.772) 79.103,89.263 89.475,89.263 90.051,89.84 107.24,89.84 D4.14
NetD3_8: D3.8 D3.12 | length 7.5
  Top Layer w0.38: D3.12 60.885,69.901 61.698,69.088 64.688,69.088 65.965,70.365 D3.8
NetD3_9: D3.9 D3.10 D4.12 | length 60.8
  Top Layer w0.38: D3.10 D3.9 64.695,72.161 67.437,74.903 v1(67.437,78.791)
  Bottom Layer w0.38: v1(67.437,78.791) 67.467,78.761 72.686,78.761 78.507,84.582 110.452,84.582 D4.12
NetD3_11: D3.11 D7.14 | length 83.8
  Top Layer w0.38: D3.11 62.155,71.705 v1(62.916,72.466) ; D7.14 107.442,101.867 107.442,91.745 107.544,91.643 107.544,77.749 v1(110.134,75.159)
  Bottom Layer w0.38: v1(62.916,72.466) 64.72,74.27 75.407,74.27 75.901,74.764 78.115,74.764 78.608,74.27 84.989,74.27 87.549,71.71 109.378,71.71 110.134,72.466 v1(110.134,75.159)
NetD4.1_3: D4.1.3 D5.7 | length 40.4
  Top Layer w0.38: D4.1.3 60.93,56.688 61.366,57.125 85.16,57.125 85.58,56.705 89.01,56.705 89.43,57.125 98.349,57.125 98.85,56.623 D5.7
NetD4.2_6: D4.2.6 D6.7 | length 72.6
  Top Layer w0.38: D4.2.6 79.765,73.905 v1(81.585,72.085) ; D6.7 143.225,70.567 v1(144.551,69.24)
  Bottom Layer w0.38: v1(81.585,72.085) 84.43,69.24 v1(144.551,69.24)
NetD4.3_8: D4.3.8 D8.7 | length 85.4
  Top Layer w0.38: v1(78.384,68.732) 78.816,69.164 80.061,69.164 80.76,69.863 D4.3.8 ; v1(142.189,82.144) 142.189,82.728 143.225,83.49 D8.7
  Bottom Layer w0.38: v1(78.384,68.732) 78.384,70.621 80.874,73.11 83.423,73.11 86.251,70.282 141.275,70.282 142.265,71.272 142.265,82.067 v1(142.189,82.144)
NetD4.4_12: D4.4.12 D4.4.13 D7.12 | length 72.4
  Top Layer w0.38: D4.4.13 D4.4.12 75.405,61.366 75.786,61.747 78.892,61.747 82.652,65.507 82.652,89.078 v1(83.998,90.424)
  Bottom Layer w0.38: v1(83.998,90.424) 88.646,90.424 102.387,104.165 112.54,104.165 D7.12
NetD9_2: D9.2 XP2.1 | length 21.9
  Top Layer w0.38: XP2.1 48.74,68.125 49.581,67.285 54.864,67.285 55.855,68.275 55.855,72.173 57.646,73.965 59.179,73.965 59.585,74.371 D9.2
NetD9_3: D9.3 D9.4 D9.5 | length 2.5
  Top Layer w0.38: D9.3 D9.4 D9.5
NetD10_1: D10.1 D10.9 XP2.2 | length 142.9
  Top Layer w0.38: D10.1 135.805,98.552 136.482,99.229 140.978,99.229 144.695,102.946 144.695,103.251 ; D10.9 144.695,103.251 ; v1(145.974,103.251) 144.695,103.251
  Bottom Layer w0.38: XP2.2 45.285,72.85 44.374,73.762 44.374,84.074 68.275,107.975 141.249,107.975 v1(145.974,103.251)
NetD10_7: D10.7 D10.15 XP2.3 | length 141.6
  Top Layer w0.38: D10.15 v1(137.075,106.934) ; D10.7 143.425,95.724 143.662,95.961 145.39,95.961 145.39,94.539 v1(145.948,93.98)
  Bottom Layer w0.38: XP2.3 47.493,74.143 45.517,74.143 44.958,74.701 44.958,83.718 68.174,106.934 v1(137.075,106.934) 139.852,106.934 145.948,100.838 v1(145.948,93.98)
NetR10_2: R10.2 XP2.8 | length 27
  Top Layer w0.38: v1(65.481,95.525) R10.2
  Bottom Layer w0.38: XP2.8 47.447,81.717 51.673,81.717 v1(65.481,95.525)
NetR11_2: R11.2 XP2.7 | length 18.2
  Top Layer w0.38: R11.2 61.425,83.939 v1(61.773,83.591)
  Bottom Layer w0.38: XP2.7 58.651,80.47 v1(61.773,83.591)
NetR13_2: R13.2 XP2.6 | length 31.8
  Top Layer w0.38: R13.2 72.745,87.275 v1(72.873,87.147)
  Bottom Layer w0.38: XP2.6 47.442,79.172 62.332,79.172 70.307,87.147 v1(72.873,87.147)
Сanal_A_0: D5.4 R1.2 | length 45.2
  Top Layer w0.38: D5.4 95.04,52.4 95.167,52.273 103.226,52.273 104.064,53.111 104.064,57.76 102.641,59.182 102.641,66.243 103.048,66.65 106.959,66.65 107.594,66.015 107.594,64.846 112.928,59.512 112.928,56.49 113.343,56.075 R1.2
Сanal_A_1: D5.3 R2.2 | length 22.6
  Top Layer w0.38: D5.3 93.77,52.788 95.098,51.46 105.181,51.46 109.721,56 R2.2
Сanal_A_3: D5.2 R3.2 | length 34.4
  Top Layer w0.38: D5.2 92.5,51.493 93.472,50.521 116.23,50.521 117.6,51.89 R3.2
Сanal_A_4: D5.1 R4.2 | length 45.1
  Top Layer w0.38: D5.1 91.23,50.394 92.068,49.555 121.626,49.555 127.9,55.829 R4.2
Сanal_A_5: D5.15 R5.2 | length 39.1
  Top Layer w0.38: D5.15 92.5,63.595 v1(92.583,63.678) ; v1(126.035,63.297) 128.425,63.297 R5.2
  Bottom Layer w0.38: v1(92.583,63.678) 125.654,63.678 v1(126.035,63.297)
Сanal_A_6: D5.14 R6.2 | length 30
  Top Layer w0.38: D5.14 v1(93.77,64.719) ; v1(106.629,62.128) 108.509,60.249 108.509,56.631 108.102,56.225 R6.2
  Bottom Layer w0.38: v1(93.77,64.719) 92.05,64.719 91.542,64.211 91.542,63.246 92.659,62.128 v1(106.629,62.128)
Сanal_A_7: D5.13 R7.2 | length 29.4
  Top Layer w0.38: D5.13 95.04,60.383 v1(95.936,59.487) ; v1(119.304,58.064) 119.304,56.841 120.294,55.85 R7.2
  Bottom Layer w0.38: v1(95.936,59.487) 97.358,58.064 v1(119.304,58.064)
Сanal_A_8: D5.12 R8.2 | length 31.7
  Top Layer w0.38: D5.12 96.31,60.579 97.739,59.487 v1(99.492,59.487) ; v1(123.063,56.134) 123.063,56.054 R8.2
  Bottom Layer w0.38: v1(99.492,59.487) 100.635,60.63 118.567,60.63 v1(123.063,56.134)
pads on no net: D1.9 D1.11 D2.1 D2.2 D2.3 D2.4 D2.5 D2.6 D2.8 D2.9 D2.10 D2.11 D2.12 D2.13 D4.1.4 D4.1.5 D4.1.6 D4.1.7 D4.1.8 D4.1.9 D4.1.10 D4.1.11 D4.1.12 D4.1.13 D4.1.14 D4.2.1 D4.2.2 D4.2.3 D4.2.7 D4.2.8 D4.2.9 D4.2.10 D4.2.11 D4.2.12 D4.2.13 D4.2.14 D4.3.1 D4.3.2 D4.3.3 D4.3.4 D4.3.5 D4.3.6 D4.3.7 D4.3.11 D4.3.12 D4.3.13 D4.3.14 D4.4.1 D4.4.2 D4.4.3 D4.4.4 D4.4.5 D4.4.6 D4.4.7 D4.4.8 D4.4.9 D4.4.10 D4.4.11 D4.4.14 D4.9 D4.11 D7.9 D7.11 D9.7 D9.11 D9.12 D9.13 D9.14 D10.6 D10.12 D10.13 R14.1

## Silkscreen, mask and mechanical layers (free items; w line width, h text height)
Mechanical 1:
  lines w0.254: 43.275,109.975 43.325,109.925 43.325,46.725 159.525,46.725 160.975,48.175 160.975,109.975 43.275,109.975